# EAGLE board CAN shield rev1 (EAGLE 8.1.0)
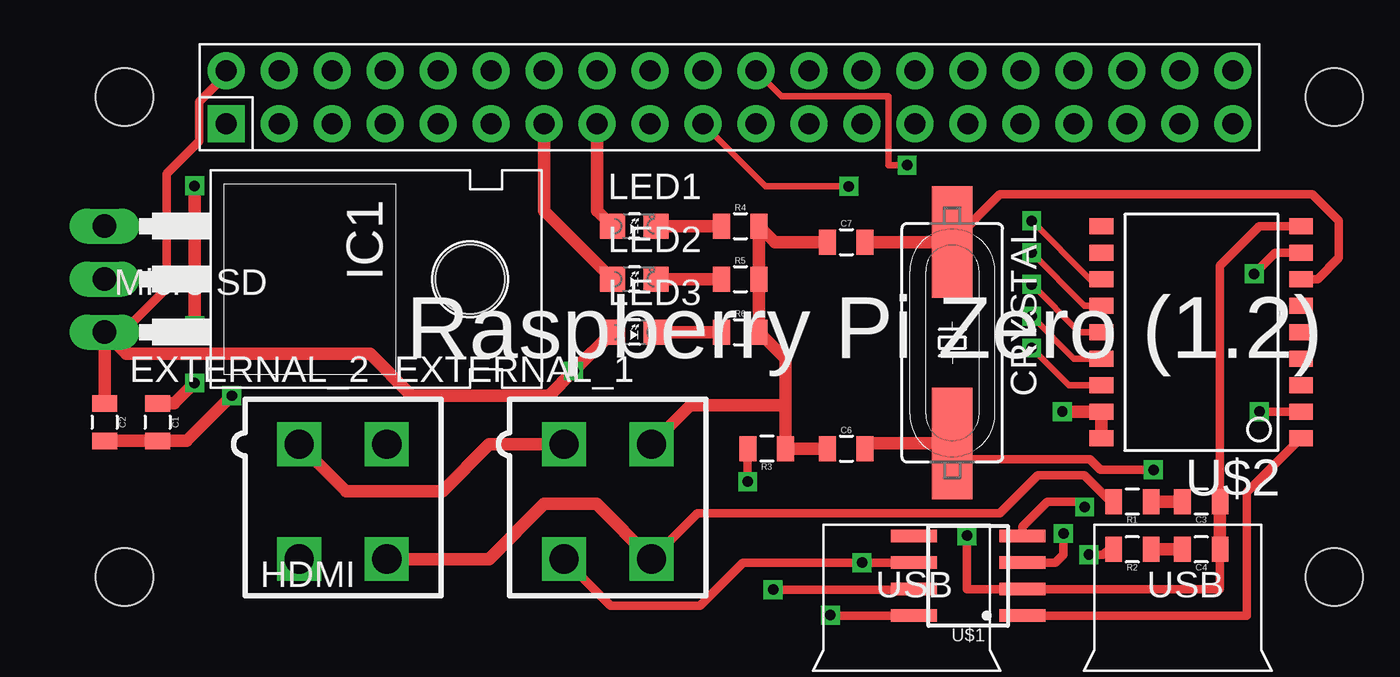
[diagram p0: board, top side]
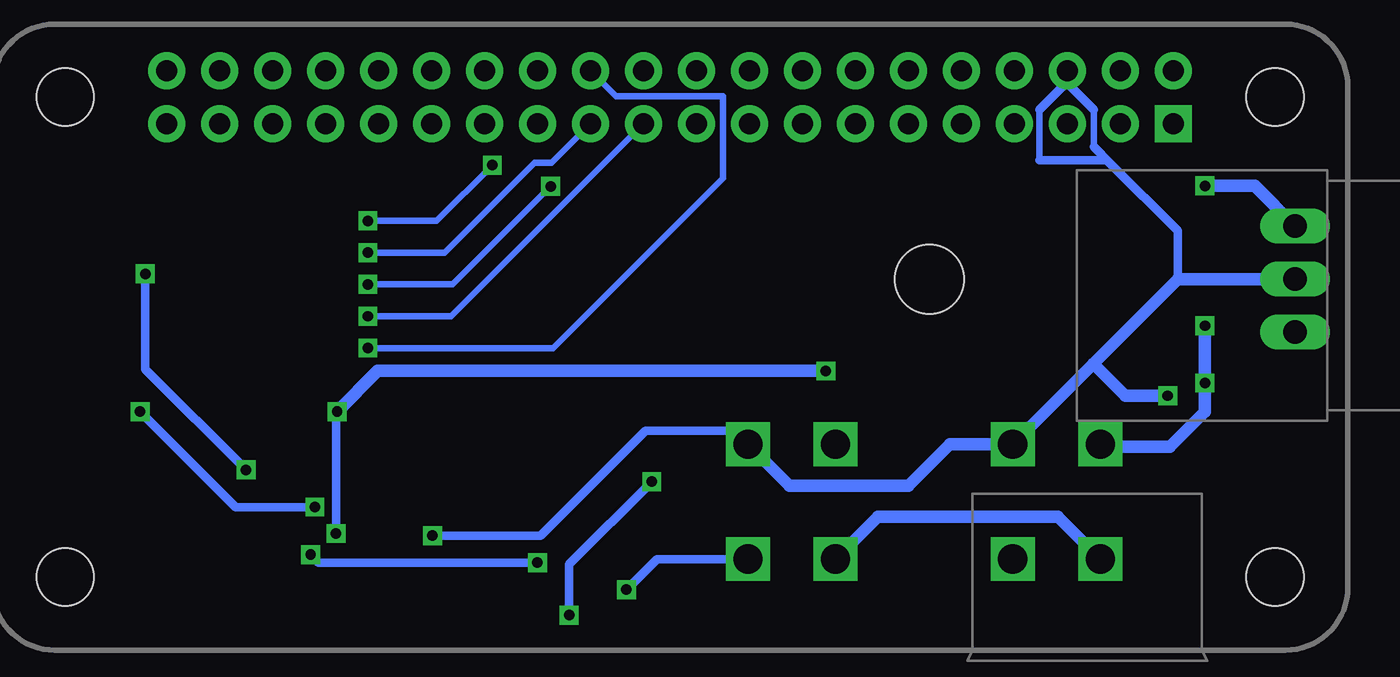
[diagram p1: board, bottom side, seen from below]

No outline drawn. Coordinates in mm, seen from the top.
Copper layers (1*16): Top 0.035mm / dielectric 1.5mm / Bottom 0.035mm
Design rules "default *": minimum track width 10mil, minimum drill 24mil, track to track 6mil, track to pad 6mil, pad to pad 6mil, via to via 6mil, smd to smd 6mil, copper to edge 40mil, drill to drill 8mil, minimum pad ring 10mil, minimum via ring 8mil, stop-mask expansion 4mil, vias tented up to drill 0mil, thermal gap 10mil

## Footprints (pad centres in the part's own frame; a part is rotated, then mirrored left to right if it is on the bottom)
0805 = smd 0.8 x 1.2: 1 -0.9,0; 2 0.9,0
HC49UP = smd 5.334 x 1.93: 1 -4.826,0; 2 4.826,0
MINIFIT_5566-4 = drill 1.4 square: 1 2.1,-2.75; 2 -2.1,-2.75; 3 2.1,2.75; 4 -2.1,2.75
TO-220-H = drill 1.118 long: 1 -2.54,-6.35; 2 0,-6.35; 3 2.54,-6.35 | hole 3.302: 0,11.176
LED-805 = smd 1.2 x 1.2: A 0,-1.05; C 0,1.05
SOIC-08 = smd 0.6 x 2.2: 1 -1.905,-2.6; 2 -0.635,-2.6; 3 0.635,-2.6; 4 1.905,-2.6; 5 1.905,2.6; 6 0.635,2.6; 7 -0.635,2.6; 8 -1.905,2.6
SOIC-18W = smd 0.762 x 1.143: 1 -5.08,-4.788; 2 -3.81,-4.788; 3 -2.54,-4.788; 4 -1.27,-4.788; 5 0,-4.788; 6 1.27,-4.788; 7 2.54,-4.788; 8 3.81,-4.788; 9 5.08,-4.788; 10 5.08,4.788; 11 3.81,4.788; 12 2.54,4.788; 13 1.27,4.788; 14 0,4.788; 15 -1.27,4.788; 16 -2.54,4.788; 17 -3.81,4.788; 18 -5.08,4.788
RASPBERRY_PI_ZERO-V1.2 = drill 1 pad 1.778 square: 1 8.37,25.23 | drill 1 pad 1.778: 2 8.37,27.77; 3 10.91,25.23; 4 10.91,27.77; 5 13.45,25.23; 6 13.45,27.77; 7 15.99,25.23; 8 15.99,27.77; 9 18.53,25.23; 10 18.53,27.77; 11 21.07,25.23; 12 21.07,27.77; 13 23.61,25.23; 14 23.61,27.77; 15 26.15,25.23; 16 26.15,27.77; 17 28.69,25.23; 18 28.69,27.77; 19 31.23,25.23; 20 31.23,27.77; 21 33.77,25.23; 22 33.77,27.77; 23 36.31,25.23; 24 36.31,27.77; 25 38.85,25.23; 26 38.85,27.77; 27 41.39,25.23; 28 41.39,27.77; 29 43.93,25.23; 30 43.93,27.77; 31 46.47,25.23; 32 46.47,27.77; 33 49.01,25.23; 34 49.01,27.77; 35 51.55,25.23; 36 51.55,27.77; 37 54.09,25.23; 38 54.09,27.77; 39 56.63,25.23; 40 56.63,27.77 | hole 2.75: 3.5,3.5; 3.5,26.5; 61.5,3.5; 61.5,26.5

## Placement (x,y rotation side)
C1  .22uF  [0805]  5.08,10.92 270 top
C2  .1uF  [0805]  2.54,10.92 270 top
C3  560pF  [0805]  55.12,7.11 180 top
C4  560pF  [0805]  55.12,4.83 180 top
C6  22pF  [0805]  38.1,9.65 0 top
C7  22pF  [0805]  38.1,19.56 0 top
CRYSTAL  16MHz  [HC49UP]  43.18,14.73 270 top
EXTERNAL_1  MINIFIT_5566-4  [MINIFIT_5566-4]  26.67,7.11 180 top
EXTERNAL_2  MINIFIT_5566-4  [MINIFIT_5566-4]  13.97,7.11 180 top
IC1  [TO-220-H]  8.89,17.78 270 top
LED1  [LED-805]  27.94,20.32 270 top
LED2  [LED-805]  27.94,17.78 270 top
LED3  [LED-805]  27.94,15.24 270 top
R1  100  [0805]  51.82,7.11 180 top
R2  100  [0805]  51.82,4.83 180 top
R3  4.7k  [0805]  34.29,9.65 180 top
R4  150  [0805]  33.02,20.32 0 top
R5  150  [0805]  33.02,17.78 0 top
R6  150  [0805]  33.02,15.24 0 top
U$1  MCP2551  [SOIC-08]  43.94,3.56 90 top
U$2  MCP2515SMD  [SOIC-18W]  55.12,15.24 90 top
U$3  RASPBERRY_PI_ZERO-V1.2  [RASPBERRY_PI_ZERO-V1.2]  0,0 0 top

## Library data of the parts
C1-C4 C6 C7 IC1 LED1-LED3 R1-R6 U$1-U$3 = HyTechDevices
CRYSTAL = SparkFun-FreqCtrl
EXTERNAL_1 EXTERNAL_2 = HyTechDevices; OC_FARNELL: unknown; OC_NEWARK: unknown

## Nets
+5V: C2.1 IC1.3 LED3.A U$1.3 U$2.17 U$2.18 U$3.2
CAN-H: EXTERNAL_1.4 EXTERNAL_2.4 R1.2 U$1.7
CAN-L: EXTERNAL_1.3 EXTERNAL_2.3 R2.2 U$1.6
CS: U$2.16 U$3.24
GND: C1.2 C2.2 C3.1 C4.1 C6.1 C7.1 EXTERNAL_1.2 EXTERNAL_2.2 IC1.2 R3.1 R4.2 R5.2 R6.2 U$1.2 U$2.9 U$3.6
INT: U$2.12 U$3.22
LED1: LED1.A U$3.15
LED2: LED2.A U$3.13
MISO: U$2.15 U$3.21
MOSI: U$2.14 U$3.19
N$1: LED1.C R4.1
N$2: LED2.C R5.1
N$5: C1.1 EXTERNAL_1.1 EXTERNAL_2.1 IC1.1
N$7: LED3.C R6.1
N$11: C6.2 CRYSTAL.2 U$2.8
N$12: U$1.1 U$2.1
N$13: U$1.4 U$2.2
N$14: C3.2 R1.1
N$15: C7.2 CRYSTAL.1 U$2.7
N$16: R3.2 U$1.8
N$17: C4.2 R2.1
SCK: U$2.13 U$3.23

## Tracks (layer width: path | path; a pad name or v marks a point on that pad's centre or on a via)
+5V  (via drill 0.5)
  Top 0.406: U$3.2 8.37,27.58 7.08,26.29 7.08,24.38 5.52,22.83 5.52,17.34 3.42,15.24 IC1.3 | U$1.3 48.13,4.19 48.51,4.57 v48.51,5.59
  Top 0.61: C2.1 IC1.3 3.58,14.2 15.27,14.2 17.27,12.19 23.84,12.19 v25.03,13.38 LED3.A | U$2.18 U$2.17 v48.46,11.43
  Bottom 0.406: v48.51,5.59 48.51,11.38 v48.46,11.43
  Bottom 0.61: v25.03,13.38 46.52,13.38 v48.46,11.43
CAN-H  (via drill 0.5)
  Top 0.406: v34.59,2.9 41.32,2.9 U$1.7 | EXTERNAL_1.4 30.96,6.55 45.47,6.55 47.3,8.38 49.53,8.38 50.8,7.11 R1.2
  Top 0.61: EXTERNAL_2.4 20.97,4.36 23.62,7.01 26.12,7.01 EXTERNAL_1.4
  Bottom 0.406: EXTERNAL_1.4 33.13,4.36 v34.59,2.9
CAN-L  (via drill 0.5)
  Top 0.406: U$1.6 v38.86,4.19 33.15,4.19 31.09,2.13 26.8,2.13 EXTERNAL_1.3 | R2.2 50.58,4.71 50.44,4.57 v49.73,4.57
  Bottom 0.406: v38.86,4.19 49.35,4.19 v49.73,4.57
  Bottom 0.61: EXTERNAL_2.3 13.91,6.4 22.53,6.4 EXTERNAL_1.3
CS  (via drill 0.5)
  Top 0.305: U$2.16 48.77,12.7 v46.99,14.48
  Bottom 0.305: v46.99,14.48 38.1,14.48 29.97,22.61 29.97,26.54 35.08,26.54 U$3.24
GND  (via drill 0.5)
  Top 0.406: C4.1 56.02,2.92 U$1.2 43.89,2.92 v43.89,5.49 | C3.1 56.02,18.43 57.91,20.32 U$2.9
  Top 0.61: C2.2 C1.2 6.47,10.02 v8.64,12.19 | C7.1 34.68,19.56 R4.2 R5.2 R6.2 35.19,13.97 35.19,11.73 | 35.19,11.73 R3.1 C6.1 | 35.19,11.73 30.64,11.73 EXTERNAL_1.2 | C4.1 C3.1
  Bottom 0.305: 12.19,25.91 12.19,24.13 | 14.78,25.91 14.78,23.47
  Bottom 0.406: 8.15,17.78 8.15,20.09 11.4,23.34 | 11.4,23.34 12.19,24.13 | 12.19,25.91 13.45,27.17 U$3.6 13.45,27.24 14.78,25.91 | 14.78,23.47 11.53,23.47 11.4,23.34 | v43.89,5.49 38.71,5.49 33.68,10.52 29.42,10.52 EXTERNAL_1.2
  Bottom 0.61: IC1.2 8.15,17.78 12.2,13.73 | 12.2,13.73 EXTERNAL_2.2 19.09,9.86 21.08,7.87 26.78,7.87 EXTERNAL_1.2 | v8.64,12.19 10.67,12.19 12.2,13.73
INT  (via drill 0.5)
  Top 0.305: U$2.12 49.78,17.78 v46.99,20.57 | v41.02,23.24 40.13,23.24 40.13,26.54 35,26.54 U$3.22
  Bottom 0.305: v46.99,20.57 43.69,20.57 v41.02,23.24
LED1
  Top 0.61: LED1.A 26.15,21.06 U$3.15
LED2
  Top 0.61: LED2.A 23.61,21.06 U$3.13
MISO  (via drill 0.5)
  Top 0.305: U$2.15 49.02,13.97 v46.99,16
  Bottom 0.305: v46.99,16 43,16 U$3.21
MOSI  (via drill 0.5)
  Top 0.305: U$2.14 49.28,15.24 v46.99,17.53 | v38.23,22.23 34.23,22.23 U$3.19
  Bottom 0.305: v46.99,17.53 42.93,17.53 v38.23,22.23
N$1
  Top 0.61: R4.1 LED1.C
N$2
  Top 0.61: R5.1 LED2.C
N$5  (via drill 0.5)
  Top 0.61: v6.86,22.25 v6.86,15.54 | C1.1 5.88,11.82 v6.86,12.8 | EXTERNAL_1.1 20.99,9.86 18.75,7.62 14.11,7.62 EXTERNAL_2.1
  Bottom 0.61: IC1.1 4.47,22.25 v6.86,22.25 | v6.86,15.54 v6.86,12.8 6.86,11.43 8.53,9.75 11.76,9.75 EXTERNAL_2.1
N$7
  Top 0.61: R6.1 LED3.C
N$11  (via drill 0.5)
  Top 0.406: U$2.8 58.67,19.05 v57.66,18.03 | v52.83,8.64 50.29,8.64 49.78,9.14 43.94,9.14 CRYSTAL.2
  Top 0.61: CRYSTAL.2 39.25,9.91 C6.2
  Bottom 0.406: v57.66,18.03 57.66,13.46 v52.83,8.64
N$12
  Top 0.406: U$1.1 57.3,1.65 57.3,7.56 U$2.1
N$13  (via drill 0.5)
  Top 0.406: U$1.4 46.54,5.9 47.75,7.11 49.28,7.11 v49.53,6.86 | v57.91,11.43 U$2.2
  Bottom 0.406: v49.53,6.86 53.34,6.86 v57.91,11.43
N$14
  Top 0.61: C3.2 R1.1
N$15
  Top 0.406: U$2.7 60.71,17.78 61.72,18.8 61.72,20.57 60.45,21.84 45.47,21.84 CRYSTAL.1
  Top 0.61: CRYSTAL.1 C7.2
N$16  (via drill 0.5)
  Top 0.406: U$1.8 37.36,1.65 v37.34,1.68 | v33.38,8.08 33.38,9.64 R3.2
  Bottom 0.406: v37.34,1.68 37.34,4.12 v33.38,8.08
N$17
  Top 0.61: C4.2 R2.1
SCK  (via drill 0.5)
  Top 0.305: U$2.13 49.53,16.51 v46.99,19.05
  Bottom 0.305: v46.99,19.05 43.31,19.05 38.99,23.37 38.17,23.37 U$3.23